# Altium PCB F4核心板.PcbDoc
Units mm, origin at the board's own origin, x right, y up, seen from the top; angles counter-clockwise.
Board outline 23 x 25 mm, 2 copper layers (Top Layer, Bottom Layer), stack 0.98 mm thick; 26 components, 60 nets, 180 pads, 115 vias.
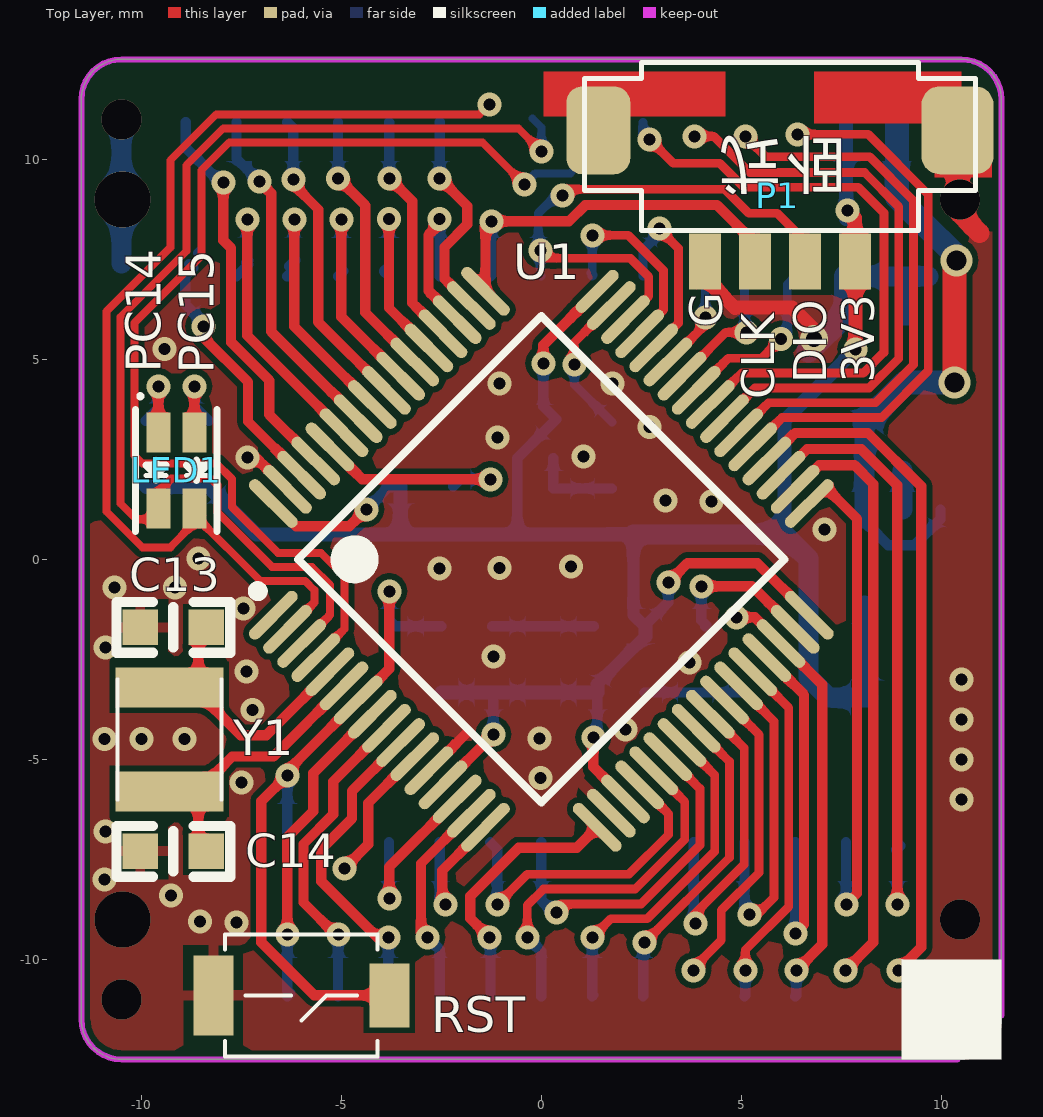
[diagram p0: Top Layer view]
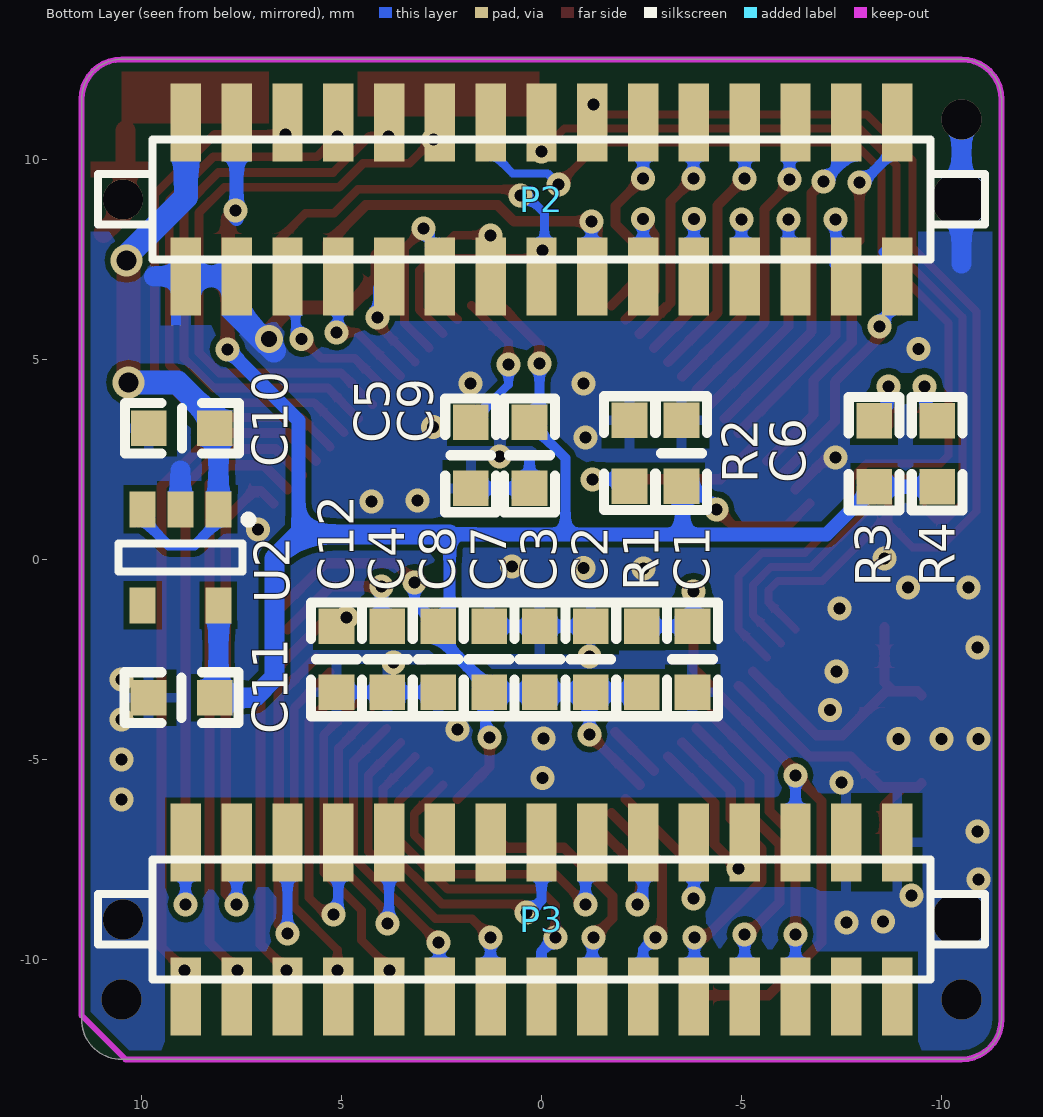
[diagram p1: Bottom Layer view, seen from below]
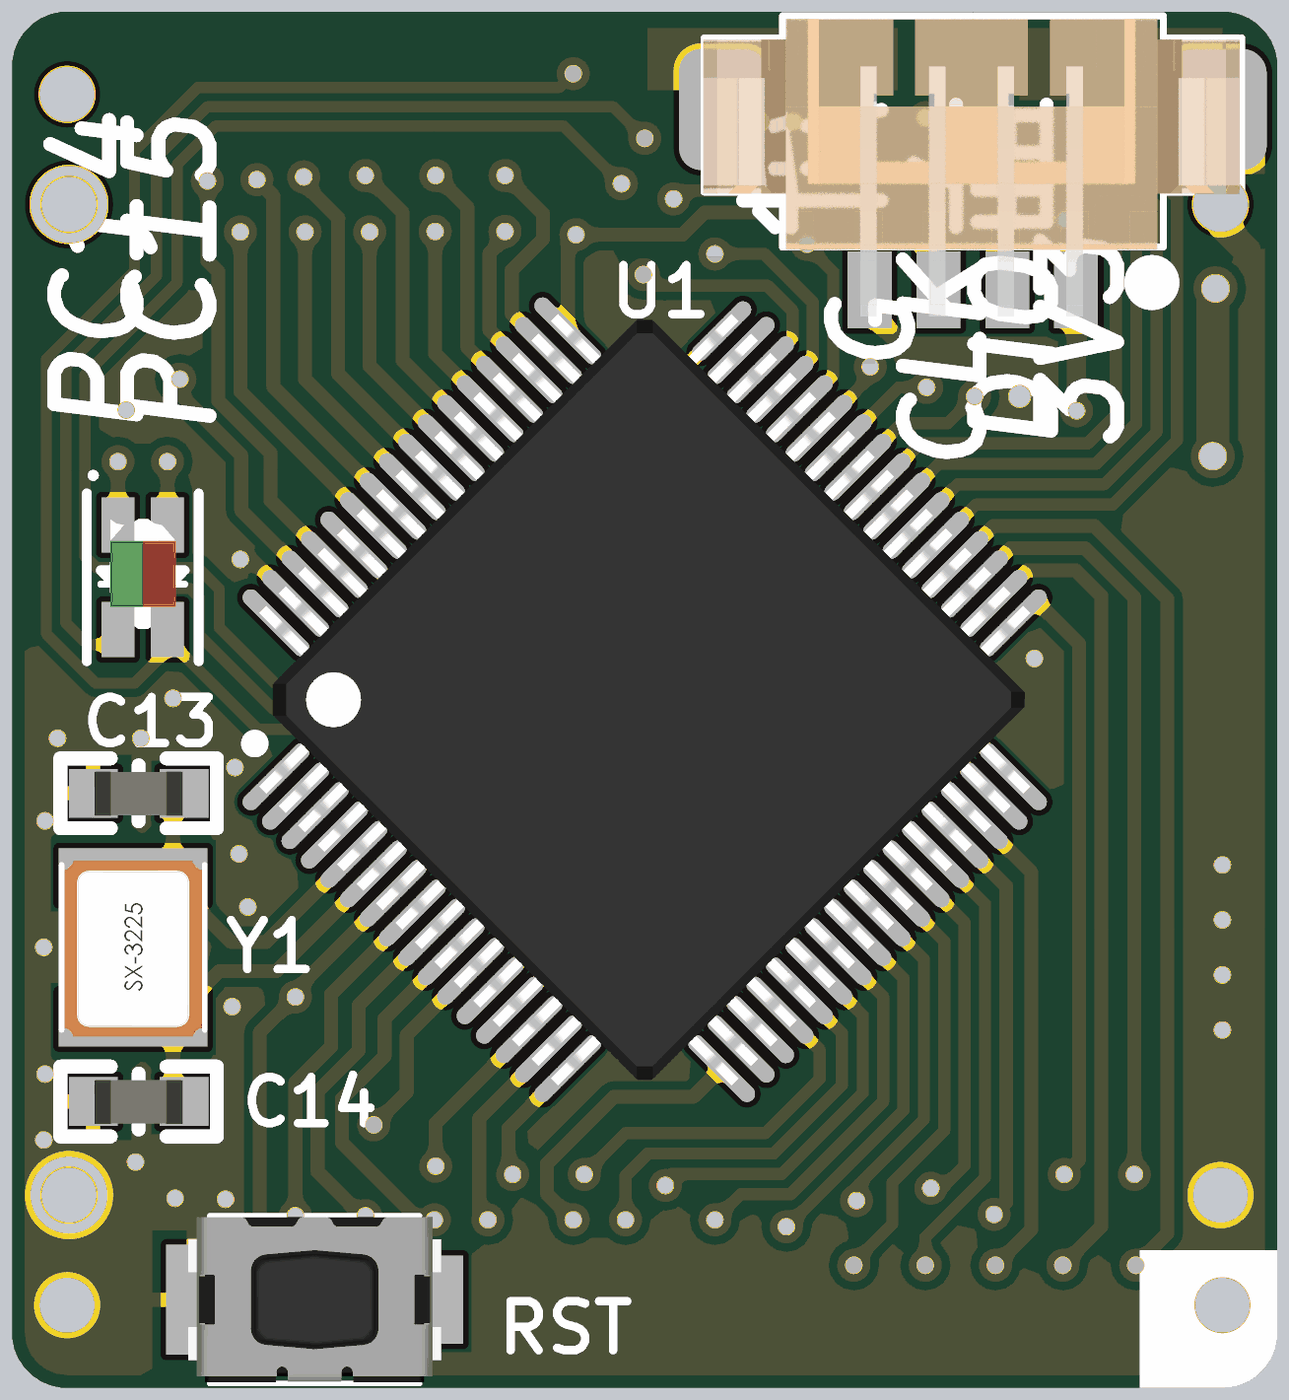
[diagram p2: 3D render of the assembled board from above, using the file's embedded part models]
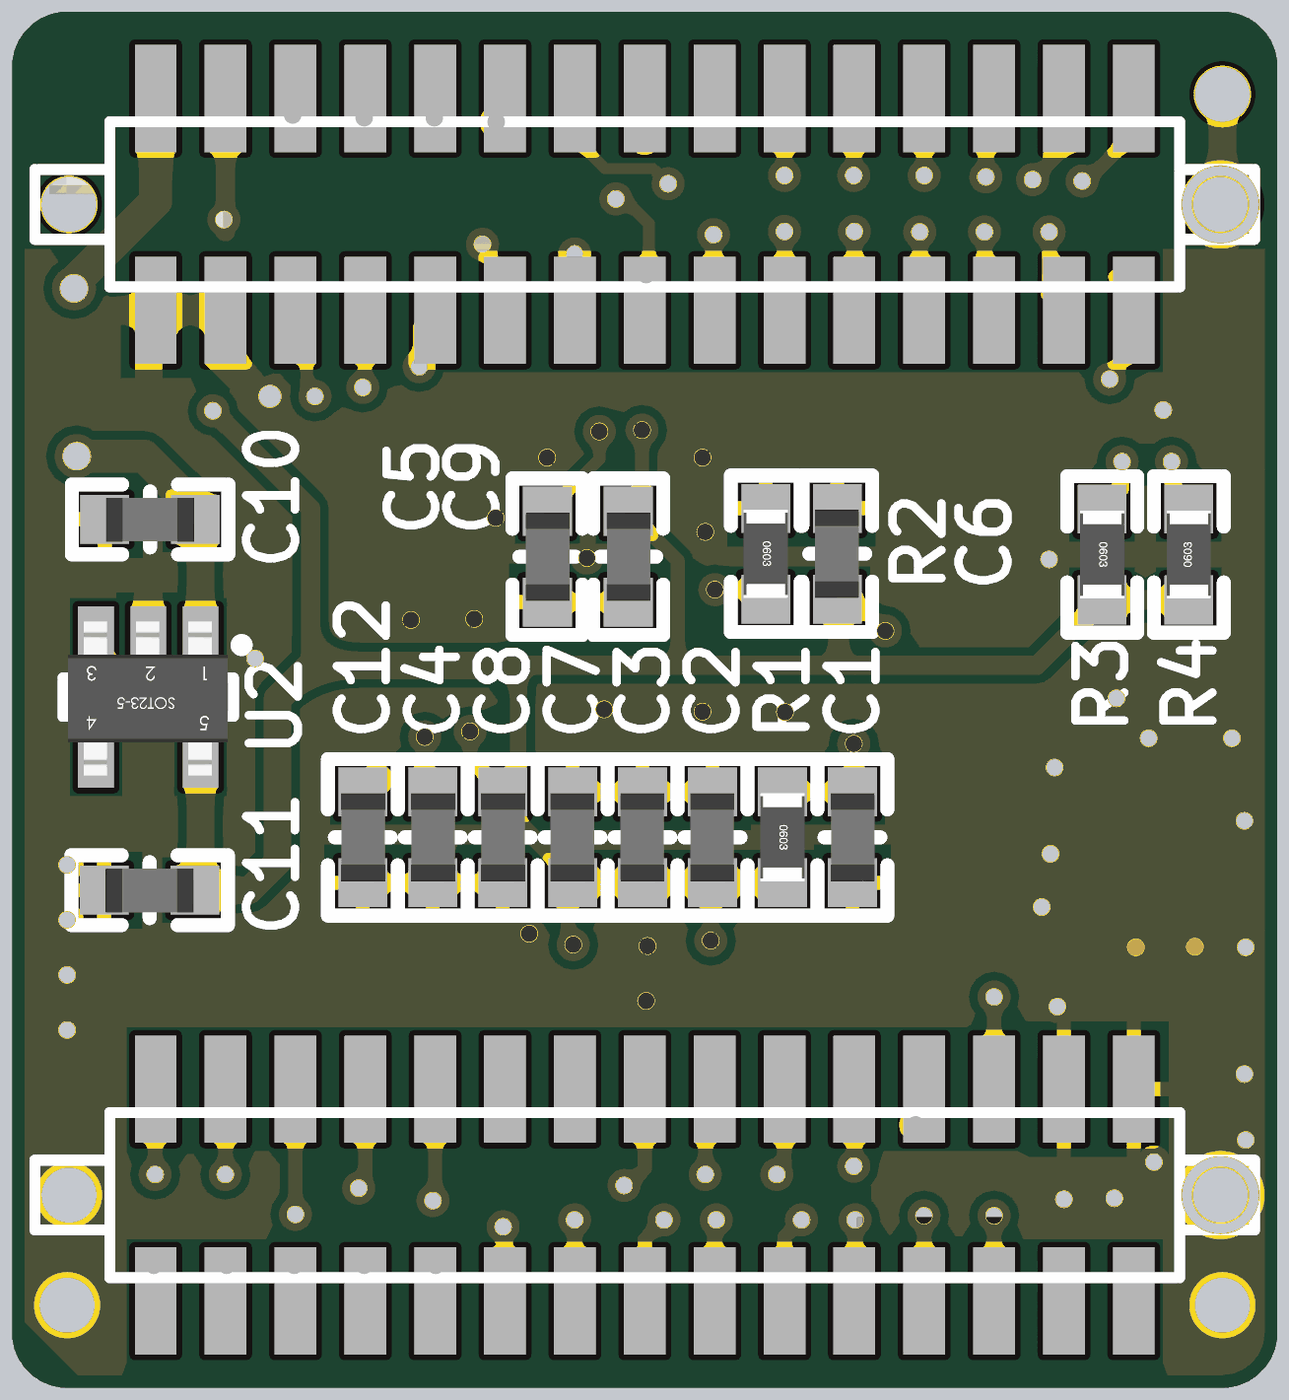
[diagram p3: 3D render of the assembled board from below, using the file's embedded part models]

## Layer stack, top to bottom
Top Solder: solder mask 0.0102, Solder Resist, Dk 3.5
Top Layer: signal copper 0.0356
Dielectric 1: dielectric 0.9086, FR-4, Dk 4.8
Bottom Layer: signal copper 0.0356
Bottom Solder: solder mask 0.0102, Solder Resist, Dk 3.5

## Board outline
-11.5,-11.5 -11.5,11.5 cw(c-10.5,11.5) -10.5,12.5 10.5,12.5 cw(c10.5,11.5) 11.5,11.5 11.5,-11.5 cw(c10.5,-11.5) 10.5,-12.5 -10.5,-12.5 cw(c-10.5,-11.5)

## Design rules (kind name [scope] priority, off if disabled: settings)
Clearance [All] p1: gap=0.15 ignorepadtopadclearanceinfootprint=FALSE except(0: Arc-Hole Track-Hole SMDPad-Hole THPad-Hole Via-Hole Fill-Hole Poly-Hole Region-Hole Text-Hole)
PolygonConnect PolygonConnect_1 [IsVia] p1: connectstyle=Direct reliefconductorwidth=0.254 reliefentries=4 polygonreliefangle="90 Angle" airgapwidth=0.254
PolygonConnect [All] p2: connectstyle=Relief reliefconductorwidth=0.254 reliefentries=4 polygonreliefangle="90 Angle" airgapwidth=0.254
RoomDefinition F4中心板 [InComponentClass('F4中心板')] p1: confinementstyle=ConfineIn formatcopy=TRUE lockcomponents=FALSE outline -13.5,-18.5 114.5,-18.5 114.5,36.5 -13.5,36.5
RoutingVias [All] p1: holewidth=0.3 width=0.6 viastyle="Through Hole" minholewidth=0.3 minwidth=0.6 maxholewidth=3 maxwidth=5
SolderMaskExpansion [All] p1: expansion=0.102 istentingtop=FALSE
Width [All] p1: maxlimit=3 minlimit=0.15 preferedwidth=0.254 minimp=50.000000 maximp=50.000000 favimp=50.000000
30 further rules are at their usual default settings.

## Components (designator, comment, footprint, x,y, rotation, side; value= is the part's Value field where it differs from the comment)
C1 "100nF" 0603C -3.775,-2.5 r90 bottom
C2 "100nF" 0603C -1.232,-2.5 r270 bottom
C3 "1uF" 0603C 0.039,-2.5 r270 bottom
C4 "2.2uF" 0603C 3.854,-2.5 r90 bottom
C5 "2.2uF" 0603C 1.77,2.6 r90 bottom
C6 "100nF" 0603C -3.5,2.653 r270 bottom
C7 "100nF" 0603C 1.311,-2.5 r270 bottom
C8 "100nF" 0603C 2.582,-2.5 r90 bottom
C9 "100nF" 0603C 0.3,2.6 r90 bottom
C10 "100nF" 0603C 8.992,3.277 r180 bottom
C11 "100nF" 0603C 9,-3.46 r180 bottom
C12 "2.2uF" 0603C 5.125,-2.5 r90 bottom
C13 "18pF" 0603C -9.2,-1.7 r0 top
C14 "18pF" 0603C -9.2,-7.3 r0 top
LED1 "Double_Color LED" 0805LEDX2 -9.125,2.225 r270 top
P1 "SWD/MX1.25" A1.25AW-4P 5.965,7.55 r180 top
P2 "HEADER" "HEADER 15x2 SMT 1.27MM" 0,9 r180 bottom
P3 "HEADER" "HEADER 15x2 SMT 1.27MM" 0,-9 r180 bottom
R1 "10k" 0603R -2.504,-2.5 r270 bottom
R2 "10k" 0603R -2.2,2.653 r270 bottom
R3 "1k" 0603R -8.315,2.639 r270 bottom
R4 "1k" 0603R -9.89,2.639 r90 bottom
RST "KEY" "SW 3mmx4mm" -6,-10.9 r180 top
U1 "STM32F405RGT6" LQFP_64 0,0 r45 top
U2 "LDO_SOT23-5" "SOT-23-5 L" 9.026,0.047 r270 bottom
Y1 "8MHz" NX3225GD -9.3,-4.5 r90 top

## Footprints (in the part's own frame and the unit in brackets; to place one, negate y for a bottom-side part, rotate by r counter-clockwise, add the part's x,y. Pads: shape width x height; smd on the part's side, far side on the other; paste and mask are expansions set on the pad)
0603C [mil] "Chip Resistor, 2-Leads, Body 1.6x0.8mm, IPC Medium Density"
  rect 35x35 smd: 1(-32.5,0) 2(32.5,0)
  silkscreen extent -56,-25 56,25, body extent -31,-16 31,15, height 18
0603R [mil] "10mil丝印"
  rect 35x35 smd: 1(-32.5,0) 2(32.5,0)
  silkscreen extent -56,-25 56,25, body extent -31,-16 31,16, height 16
0805LEDX2 [mm] "double_color"
  rect 1x0.6 smd: 1(-0.95,-0.45) 2(0.95,-0.45) 3(0.95,0.45) 4(-0.95,0.45)
  silkscreen extent -1.9,-1.02 1.52,1.02, body extent -1.06,-0.59 0.94,0.61, height 1
A1.25AW-4P [mm]
  rrect50% 1.8x2.2 smd: 0(-4.44,-3.175)
  round 1 on Top Overlay: 0(-3.253,-0.03)
  rrect50% 1.6x2.2 smd: 0(4.54,-3.175)
  rect 0.8x1.4 smd: 1(-1.875,0.1) 2(-0.625,0.1) 3(0.625,0.1) 4(1.875,0.1)
  silkscreen extent -4.88,-4.88 4.88,-0.68, body extent -4.85,-4.82 4.9,0.59, height 3.4
"HEADER 15x2 SMT 1.27MM" [mm] "2.54mm排针"
  rect 0.76x1.95 smd: 1(-8.89,1.925) 2(-8.89,-1.925) 3(-7.62,1.925) 4(-7.62,-1.925) 5(-6.35,1.925) 6(-6.35,-1.925) 7(-5.08,1.925) 8(-5.08,-1.925) 9(-3.81,1.925) 10(-3.81,-1.925) 11(-2.54,1.925) 12(-2.54,-1.925) 13(-1.27,1.925) 14(-1.27,-1.925) 15(0,1.925) 16(0,-1.925) 17(1.27,1.925) 18(1.27,-1.925) 19(2.54,1.925) 20(2.54,-1.925) 21(3.81,1.925) 22(3.81,-1.925) 23(5.08,1.925) 24(5.08,-1.925) 25(6.35,1.925) 26(6.35,-1.925) 27(7.62,1.925) 28(7.62,-1.925) 29(8.89,1.925) 30(8.89,-1.925)
  silkscreen extent -11.08,-1.5 11.08,1.5, body extent -11.22,-2.37 11.23,2.42, height 4.65
LQFP_64 [mm]
  oval 1.6x0.3 smd: 1(-5.725,3.75) 2(-5.725,3.25) 3(-5.725,2.75) 4(-5.725,2.25) 5(-5.725,1.75) 6(-5.725,1.25) 7(-5.725,0.75) 8(-5.725,0.25) 9(-5.725,-0.25) 10(-5.725,-0.75) 11(-5.725,-1.25) 12(-5.725,-1.75) 13(-5.725,-2.25) 14(-5.725,-2.75) 15(-5.725,-3.25) 16(-5.725,-3.75) 33(5.725,-3.75) 34(5.725,-3.25) 35(5.725,-2.75) 36(5.725,-2.25) 37(5.725,-1.75) 38(5.725,-1.25) 39(5.725,-0.75) 40(5.725,-0.25) 41(5.725,0.25) 42(5.725,0.75) 43(5.725,1.25) 44(5.725,1.75) 45(5.725,2.25) 46(5.725,2.75) 47(5.725,3.25)
  oval 0.3x1.6 smd: 17(-3.75,-5.725) 18(-3.25,-5.725) 19(-2.75,-5.725) 20(-2.25,-5.725) 21(-1.75,-5.725) 22(-1.25,-5.725) 23(-0.75,-5.725) 24(-0.25,-5.725) 25(0.25,-5.725) 26(0.75,-5.725) 27(1.25,-5.725) 28(1.75,-5.725) 29(2.25,-5.725) 30(2.75,-5.725) 31(3.25,-5.725) 32(3.75,-5.725) 49(3.75,5.725) 50(3.25,5.725) 51(2.75,5.725) 52(2.25,5.725) 53(1.75,5.725) 54(1.25,5.725) 55(0.75,5.725) 56(0.25,5.725) 57(-0.25,5.725) 58(-0.75,5.725) 59(-1.25,5.725) 60(-1.75,5.725) 61(-2.25,5.725) 62(-2.75,5.725) 63(-3.25,5.725) 64(-3.75,5.725)
  oval 1.4x0.3 smd: 48(5.725,3.75)
  silkscreen extent -5.7,-4.3 4.3,4.57, body extent -6.07,-6.07 6.07,6.07, height 1.62
NX3225GD [mm]
  rect 1x2.7 smd: 1(-1.3,0) 2(1.3,0)
  silkscreen extent -1.5,-1.3 1.5,1.3, body extent -1.63,-1.25 1.57,1.25, height 0.81
"SOT-23-5 L" [mm]
  rect 0.9x0.65 smd: 1(-1.2,0.95) 2(-1.2,0) 3(-1.2,-0.95) 4(1.2,-0.95) 5(1.2,0.95)
  silkscreen extent -1.05,-1.55 0.35,1.8, body extent -1.37,-1.46 1.43,1.44, height 1.09
"SW 3mmx4mm" [mm] "小龟按键"
  rect 1x1.6 smd: 1(-2.2,0)
  rect 1x2 smd: 2(2.2,0)
  silkscreen extent -1.91,-1.52 1.91,1.52, body extent -2.3,-1.5 2.3,1.5, height 2.1

## Part data
C1 C2 C3 C4 C5 C6 C7 C8 C9 C10 C11 C12 C13 C14: library part Cap, "Capacitor"
P1: library part SWD_HEADER
P2 P3: library part "HEADER 15x2", "15X2 header"
R1 R2 R3 R4: library part Res1, "Resistor"
RST: library part PushButton_2p, "Button"
U1: library part STM32F405RGT6_detail_1, "ARM Cortex-M4 32b MCU+FPU, 210DMIP, 1024 kB Flash, 192+4 kB RAM, 51 I/Os, 64-pin LQFP, -40 to +85癈, Tray"
Y1: library part XTAL, "Crystal Oscillator"

## Via types
v1: diameter 0.6, hole 0.3, Top Layer to Bottom Layer, tented both sides, 103 vias
v2: diameter 1, hole 1, Top Layer to Bottom Layer, 5 vias
v3: diameter 1.4, hole 1.4, Top Layer to Bottom Layer, 2 vias
v4: diameter 1, hole 1, Top Layer to Bottom Layer, tented both sides, 2 vias
v5: diameter 0.8, hole 0.5, Top Layer to Bottom Layer, tented both sides, 2 vias
v6: diameter 0.7, hole 0.4, Top Layer to Bottom Layer, tented both sides, 1 vias

## Nets (pads, with @x,y where several pads share a name; then routed paths per layer and width w, separated by ;. In a path a pad name is that pad's centre, name@x,y a point inside that pad or via, vN(x,y) a via of type N, cw(c..) or ccw(c..) an arc to the next point about the centre after c; other vN are vias at no path point)
3V3: C2.2 C3.2 C6.2 C7.2 C8.2 C9.2 C11.2 P1.1 P2.3 R1.2 R3.2 R4.1 U1.13 U1.19 U1.32 U1.48 U1.64 U2.5 | length 67.7
  Top Layer w0.254: U1.64 -6.128,0.825 -4.8,0.825 v1@-4.451,1.174 ; U1.13 -1.2,-4.382 v1(-1.2,-4.375) ; v1(0.05,4.9) 0.05,5.353 U1.48 ; v1(1.3,-4.45) 1.3,-5.189 U1.19 ; v1(3.175,-0.575) 3.652,-0.098 5.401,-0.098 U1.32
  Top Layer w0.35: v1(7.65,8.725) 7.84,8.535 P1.1@7.84,7.35 ; v1(7.85,5.25) P1.1@7.85,7.097
  Bottom Layer w0.254: v1(-4.375,1.25) -3.822,1.803 C6.2@-3.525,1.803 ; v1(-1.2,-4.375) C2.2@-1.2,-3.326 ; -0.6,0.625 -0.6,2.525 C9.2 0.375,3.5 0.05,3.825 v1(0.05,4.9) ; v1(1.3,-4.45) 1.4,-4.35 C7.2@1.4,-3.326 ; C8.2@2.6,-1.7 2.6,-1.647 3.175,-1.072 v1(3.175,-0.575)
  Bottom Layer w0.3: C7.2@1.4,-3.125 C8.2@2.6,-1.925 ; 2.3,0.625 2.3,-1.392 C8.2
  Bottom Layer w0.35: R4.1@-9.89,1.828 -9.876,1.814 R3.2 -7.126,0.625 -3.525,0.625 ; C6.2@-3.525,1.803 -3.525,0.625 ; R1.2@-2.5,-3.326 -1.2,-3.326 C7.2 1.4,-3.326 C7.2@1.4,-3.125 ; 2.3,0.625 -0.6,0.625 -3.525,0.625 ; C8.2@2.6,-1.925 C8.2@2.6,-1.7 ; 6.075,0.625 6.075,3.475 v1(7.85,5.25) ; P2.3 7.62,8.505 7.65,8.535 v1(7.65,8.725)
  Bottom Layer w0.5: 2.3,0.625 6.075,0.625 6.675,0.025 6.675,-2.95 7.185,-3.46 C11.2 8.076,-3.361 U2.5
5V: C10.2 P2.1 U2.1 U2.3 | length 15
  Top Layer w0.6: v5(10.325,4.425) 10.325,7.45 10.35,7.475 v5(10.375,7.475)
  Bottom Layer w0.254: U2.1 8.076,0.949 8.675,0.35 9.325,0.35 9.975,1 U2.3
  Bottom Layer w0.5: U2.1 C10.2@8.076,3.401
  Bottom Layer w0.6: C10.2@8.076,3.401 9.099,4.425 v5(10.325,4.425) ; P2.1 8.89,9.06 9.45,8.5 9.456,8.5 10.425,7.531 10.369,7.475 v5(10.375,7.475)
GND: C1.1 C2.1 C3.1 C4.1 C5.1 C6.1 C7.1 C8.1 C9.1 C10.1 C11.1 C12.1 C13.1 C14.1 P1.0@10.405,10.725 P1.4 P2.2 P2.4 P3.27 P3.29 R2.1 RST.2 U1.12 U1.18 U1.63 U2.2 | length 26.4
  Top Layer w0.254: v1(-7.35,2.55) -7.346,2.55 -7.246,2.65 U1.63 ; U1.12 -1.845,-4.32
  Top Layer w0.35: P1.4@4.097,7.6 4.097,7.028 4.846,6.279 4.866,6.3 6.264,6.3 6.813,5.751 v6(6.813,5.512)
  Top Layer w0.5: P1.0@10.405,10.725 10.405,9.06 v2(10.465,9) 10.465,8.643 10.95,8.158
  Bottom Layer w0.254: C2.1 C3.1 C7.1 ; 0.3,2.532 C9.1 C5.1 ; C8.1 C4.1 C12.1
  Bottom Layer w0.35: v6(6.813,5.512) 6.981,5.512 7.067,5.512 7.275,5.72
  Bottom Layer w0.5: -10.5,7.4 v2(-10.5,11) ; P2.4 P2.2 9.682,7.075 ; U2.2 9.026,2.225
  Bottom Layer w0.6: v6@6.685,5.216 6.981,5.512 7.62,6.151 P2.4
  other v1: -8.535,-9.057 -7.62,-9.075 -9.256,-8.4 -10.924,-7.999 -10.9,-6.8 10.5,-6 -7.5,-5.575 -0.025,-5.472 10.5,-5 -10.924,-4.498 -10,-4.487 -8.927,-4.498 -0.05,-4.475 2.1,-4.25 10.5,-4 -7.215,-3.765 10.5,-3 -7.376,-2.8 3.7,-2.575 -1.2,-2.425 -10.9,-2.2 -7.45,-1.23 -10.674,-0.7 -9.16,-0.7 -2.55,-0.225 -1.05,-0.216 0.738,-0.175 -8.574,0.025 7.083,0.75 4.25,1.45 3.1,1.469 1.05,2.575 -1.1,3.05 2.709,3.305 -1.05,4.4 1.775,4.4 -9.425,5.263
  other v2: -10.5,-11 10.5,-11 10.465,-9
  other v3: -10.465,-9 -10.465,9
  other v4: -10.465,-9 -10.465,9
NetC4_2: C4.2 U1.31 | length 3.9
  Top Layer w0.254: v1(4,-0.675) 5.271,-0.675 U1.31
  Bottom Layer w0.254: v1(4,-0.675) 4,-1.524 4.125,-1.649 C4.2@4.1,-1.675
NetC5_2: C5.2 U1.47 | length 3.7
  Top Layer w0.22: v1(0.825,4.875) 0.825,5.421 U1.47
  Bottom Layer w0.22: v1(0.825,4.875) 0.825,4.371 C5.2
NetC13_2: C13.2 U1.5 Y1.2 | length 7.1
  Top Layer w0.254: Y1.2@-9.5,-3.4 -9.4,-3.3 Y1.2@-8.8,-3.3 ; C13.2@-8.574,-1.7 -8.574,-3.075 Y1.2@-8.8,-3.3 ; U1.5 -6.875,-4.4 -7.518,-4.4 -8.618,-3.3 Y1.2@-8.8,-3.3
NetC14_2: C14.2 U1.6 Y1.1 | length 7.4
  Top Layer w0.254: Y1.1@-9.5,-5.6 -9.4,-5.7 Y1.1@-9.027,-5.7 ; C14.2@-8.574,-7.3 -8.574,-6.152 Y1.1@-9.027,-5.7 ; U1.6 -6.7,-4.932 -7.732,-4.932 -8.5,-5.7 Y1.1@-9.027,-5.7
NetLED1_1: LED1.1 R4.2 | length 2
  Top Layer w0.254: LED1.1@-9.575,3.35 v1(-9.575,4.325)
  Bottom Layer w0.254: R4.2 -9.575,3.78 v1(-9.575,4.325)
NetLED1_4: LED1.4 R3.1 | length 2
  Top Layer w0.254: LED1.4@-8.675,3.35 v1(-8.675,4.325)
  Bottom Layer w0.254: v1(-8.675,4.325) -8.675,3.825 R3.1
NetR2_2: R2.2 U1.60 | length 5.3
  Top Layer w0.254: U1.60 -4.475,2 v1(-1.275,2)
  Bottom Layer w0.254: R2.2 -2.028,2 v1(-1.275,2)
NRST: C1.2 P3.25 R1.1 RST.1 U1.7 | length 17.6
  Top Layer w0.254: RST.1 -5.675,-10.9 -7,-9.575 -7,-6.05 v1(-6.35,-5.4) -6.346,-5.4 -6.346,-5.286 U1.7 -3.8,-2.739 v1(-3.8,-0.8)
  Bottom Layer w0.254: P3.25 v1(-6.35,-5.4) ; v1(-3.8,-0.8) -3.8,-1.525 -3.65,-1.675 R1.1@-2.5,-1.675
PA0: P3.21 U1.14 | length 4.6
  Top Layer w0.254: v1(-3.8,-8.475) -3.8,-7.689 U1.14
  Bottom Layer w0.254: P3.21 -3.81,-8.465 v1(-3.8,-8.475)
PA1: P3.20 U1.15 | length 5.1
  Top Layer w0.254: v1@-3.01,-9.29 -3.01,-7.606 U1.15
  Bottom Layer w0.254: v1(-2.85,-9.45) -2.54,-9.76 P3.20
PA2: P3.19 U1.16 | length 4
  Top Layer w0.254: v1(-2.4,-8.625) -2.477,-8.548 -2.477,-7.78 U1.16
  Bottom Layer w0.254: P3.19 -2.54,-8.485 v1(-2.4,-8.625)
PA3: P3.18 U1.17 | length 6.6
  Top Layer w0.254: v1(-1.3,-9.45) -1.775,-8.975 -1.775,-8.425 -0.562,-7.213 0.884,-7.213 U1.17
  Bottom Layer w0.254: v1(-1.3,-9.45) -1.27,-9.48 P3.18
PA4: P3.17 U1.20 | length 8.2
  Top Layer w0.22: v1(-1.1,-8.625) -0.35,-7.875 2.19,-7.875 3.18,-6.885 3.18,-6.362 U1.20
  Bottom Layer w0.254: P3.17 -1.275,-7.08 -1.1,-7.255 v1(-1.1,-8.625)
PA5: P3.16 U1.21 | length 9.1
  Top Layer w0.22: v1(-0.35,-9.45) -0.35,-8.65 0.055,-8.245 2.343,-8.245 3.584,-7.004 3.584,-6.059 U1.21
  Bottom Layer w0.254: v1(-0.35,-9.45) 0,-9.8 P3.16
PA6: P3.15 U1.22 | length 8.8
  Top Layer w0.22: v1(0.375,-8.825) 0.375,-8.725 0.485,-8.615 2.497,-8.615 3.964,-7.148 3.964,-5.732 U1.22
  Bottom Layer w0.254: P3.15 0,-8.525 0.3,-8.825 v1(0.375,-8.825)
PA7: P3.14 U1.23 | length 8.5
  Top Layer w0.22: v1(1.275,-9.45) 1.74,-8.985 2.65,-8.985 4.334,-7.301 4.334,-5.395 U1.23
  Bottom Layer w0.254: P3.14 1.3,-10.895 1.275,-10.87 v1(1.275,-9.45)
PA8: P2.6 U1.41 | length 4.4
  Top Layer w0.22: U1.41 4.671,5.025 5.508,5.025 v1(5.994,5.512)
  Bottom Layer w0.22: v1(5.994,5.512) 6.147,5.664 6.147,6.872 P2.6
PA9: P2.8 U1.42 | length 3.5
  Top Layer w0.22: U1.42 4.614,5.675 v1(5.125,5.675)
  Bottom Layer w0.22: P2.8 5.08,5.72 v1(5.125,5.675)
PA10: P2.10 U1.43 | length 2.7
  Top Layer w0.22: U1.43 4.1,5.868 v1(4.1,6.05)
  Bottom Layer w0.22: P2.10 4.1,6.785 v1(4.1,6.05)
PA11: P2.12 U1.44 | length 5.7
  Top Layer w0.22: U1.44 3.426,5.901 3.426,7.774 v1@3.049,8.151 ; v1(2.95,8.275) 2.95,8.196 3.021,8.125 v1@3.048,8.151
  Bottom Layer w0.22: P2.12 P2.12@2.54,7.715 ; v1(2.95,8.275) 2.95,8.125 P2.12@2.54,7.715 ; v1@3,8.3 3.05,8.25 2.54,7.74 P2.12@2.54,7.715
PA12: P2.14 U1.45 | length 5
  Top Layer w0.22: v1(1.275,8.1) 2.175,8.1 3.056,7.219 3.056,6.238 U1.45
  Bottom Layer w0.22: P2.14 1.3,7.105 1.245,7.16 1.275,7.191 v1(1.275,8.1)
PA13/SWDIO: P1.2 P2.16 U1.46 | length 13.7
  Top Layer w0.22: v1(-0.025,7.725) 0.175,7.525 2.227,7.525 2.686,7.066 2.686,6.575 U1.46 ; v1(0.525,9.1) 0.675,9.25 4.587,9.25 5.187,8.65 5.9,8.65 6.597,7.953 P1.2@6.597,7.6
  Bottom Layer w0.22: P2.16 -0.007,7.082 0,7.09 -0.025,7.115 v1(-0.025,7.725) -0.075,7.775 -0.075,8.65 0.375,9.1 v1(0.525,9.1)
PA14/SWCLK: P1.3 P2.18 U1.49 | length 10.7
  Top Layer w0.254: U1.49 -1.397,8.303 v1(-1.25,8.45) 0.691,8.45 1.095,8.854 4.396,8.854 5.347,7.903 P1.3@5.347,7.6
  Bottom Layer w0.254: P2.18 -1.25,7.095 v1(-1.25,8.45)
PA15: P2.19 U1.50 | length 5.4
  Top Layer w0.254: v1(-2.54,9.525) -1.85,8.835 -1.85,8.375 -2.417,7.808 -2.417,7.013 U1.50
  Bottom Layer w0.254: v1(-2.54,9.525) P2.19
PB0: P3.10 U1.26 | length 7.8
  Top Layer w0.22: v1@3.8,-10.25 3.8,-10.225 4.5,-9.525 4.5,-8.775 5.444,-7.831 5.444,-4.383 U1.26
  other v1: 3.8,-10.275
PB1: P3.7 U1.27 | length 8.5
  Top Layer w0.22: U1.27 5.814,-4.046 5.814,-8.461 5.25,-9.025 5.2,-8.975 v1(5.2,-8.875)
  Bottom Layer w0.254: P3.7 5.08,-8.755 v1(5.2,-8.875)
PB2: P3.8 U1.28 | length 8.9
  Top Layer w0.22: v1@5.1,-10.225 5.1,-9.767 6.184,-8.683 6.184,-3.709 U1.28
  Bottom Layer w0.254: P3.8 5.1,-10.905 v1(5.1,-10.275) P3.8@5.1,-10.225
PB3: P2.24 U1.55 | length 6
  Top Layer w0.254: v1(-5,8.5) -5,6.061 U1.55
  Bottom Layer w0.254: P2.24 -4.95,7.205 -5,7.255 v1(-5,8.5)
PB4: P2.25 U1.56 | length 7.7
  Top Layer w0.254: v1(-6.2,9.5) -6.2,9.375 -5.57,8.746 -5.577,8.739 -5.577,5.931 U1.56
  Bottom Layer w0.254: P2.25 -6.2,10.775 v1(-6.2,9.5)
PB5: P2.26 U1.57 | length 7
  Top Layer w0.254: v1(-6.175,8.5) -6.175,5.821 U1.57
  Bottom Layer w0.254: P2.26 -6.2,7.225 -6.3,7.325 -6.15,7.475 -6.175,7.5 v1(-6.175,8.5)
PB6: P2.27 U1.58 | length 8.7
  Top Layer w0.254: v1(-7.05,9.45) -6.752,9.152 -6.752,5.691 U1.58
  Bottom Layer w0.254: P2.27 -7.62,10.02 v1(-7.05,9.45)
PB7: P2.28 U1.59 | length 7.9
  Top Layer w0.254: v1(-7.35,8.5) -7.35,5.596 -4.932,3.178 U1.59
  Bottom Layer w0.254: P2.28 -7.325,7.37 -7.375,7.42 -7.325,7.47 -7.35,7.495 v1(-7.35,8.5)
PB8: P2.29 U1.61 | length 9.9
  Top Layer w0.254: v1(-7.95,9.425) -7.95,7.975 -7.754,7.779 -7.754,5.428 -6.8,4.474 -6.8,3.618 U1.61
  Bottom Layer w0.254: P2.29 -8.89,10.286 -8.029,9.425 v1(-7.95,9.425)
PB9: P2.30 U1.62 | length 6.8
  Top Layer w0.254: v1(-8.45,5.825) -8.45,5.603 -8.475,5.578 -7.334,4.437 -7.334,3.445 U1.62
  Bottom Layer w0.254: P2.30@-8.8,7.385 -8.7,7.285 -8.9,7.085 -8.9,6.375 -8.375,5.85 -8.425,5.8 v1(-8.45,5.825) ; P2.30@-8.575,7.66 P2.30@-8.55,7.685
PB10: P3.5 U1.29 | length 9.7
  Top Layer w0.254: U1.29 6.571,-3.389 6.571,-9.129 v1(6.35,-9.35)
  Bottom Layer w0.254: v1(6.35,-9.35) 6.35,-7.125 6.375,-7.1 P3.5
PB11: C12.2 P3.6 U1.30 | length 10.9
  Top Layer w0.254: v1(4.875,-1.45) 5.339,-1.45 U1.30 7.025,-3.136 7.025,-9.625 v1(6.375,-10.275)
  Bottom Layer w0.254: P3.6 6.375,-10.9 v1(6.375,-10.275) P3.6@6.375,-10.25
PB12: P3.3 U1.33 | length 12.9
  Top Layer w0.254: U1.33 7.012,1.708 7.196,1.708 7.896,1.009 7.896,-8.092 7.894,-8.094 7.894,-8.356 v1(7.625,-8.625)
  Bottom Layer w0.254: P3.3 7.62,-8.62 v1(7.625,-8.625)
PB13: P3.4 U1.34 | length 14.8
  Top Layer w0.254: U1.34 6.946,2.35 7.832,2.35 8.3,1.882 8.3,-9.575 v1(7.6,-10.275)
PB14: P3.1 U1.35 | length 15.7
  Top Layer w0.254: U1.35 6.643,2.754 8,2.754 8.9,1.854 v1(8.9,-8.625)
  Bottom Layer w0.254: P3.1 8.975,-7.16 8.875,-7.26 8.9,-7.285 v1(8.9,-8.625)
PB15: P3.2 U1.36 | length 17.1
  Top Layer w0.254: U1.36 6.34,3.158 8.167,3.158 9.5,1.825 9.5,-9.7 v1(8.925,-10.275)
  Bottom Layer w0.254: P3.2@8.925,-10.325 v1(8.925,-10.275) P3.2@8.925,-10.225
PC0: P3.26 U1.8 | length 8
  Top Layer w0.254: v1(-6.35,-9.375) -6.35,-6.95 -5.7,-6.3 -5.7,-5.346 U1.8
  Bottom Layer w0.254: P3.26 -6.275,-10.85 -6.35,-10.775 v1(-6.35,-9.375)
PC1: P3.24 U1.9 | length 8
  Top Layer w0.254: v1(-5.075,-9.375) -5.15,-9.375 -5.946,-8.579 -5.946,-7.117 -5.2,-6.371 -5.2,-5.554 U1.9
  Bottom Layer w0.254: P3.24 -5.08,-9.38 v1(-5.075,-9.375)
PC2: P3.22 U1.10 | length 8
  Top Layer w0.254: v1(-3.825,-9.45) -4.1,-9.45 -5.502,-8.048 -5.502,-7.245 -4.729,-6.472 -4.729,-5.79 U1.10
  Bottom Layer w0.254: v1(-3.825,-9.45) -3.825,-10.91 P3.22
PC3: P3.23 U1.11 | length 3.5
  Top Layer w0.254: v1(-4.925,-7.725) -4.325,-7.125 -4.325,-6.093 U1.11
PC4: P3.12 U1.24 | length 8
  Top Layer w0.22: v1(2.575,-9.575) 2.583,-9.575 4.704,-7.454 4.704,-5.058 U1.24
  Bottom Layer w0.254: P3.12 2.55,-10.915 2.55,-9.525 2.575,-9.55 v1(2.575,-9.575)
PC5: P3.9 U1.25 | length 8.1
  Top Layer w0.22: v1(3.85,-9.1) 3.85,-8.85 5.074,-7.626 5.074,-4.72 U1.25
  Bottom Layer w0.254: P3.9 3.81,-9.06 v1(3.85,-9.1)
PC6: P2.5 U1.37 | length 13.5
  Top Layer w0.22: U1.37 6.02,3.545 8.507,3.545 9.675,4.713 9.675,9.12 8.17,10.625 v1(6.4,10.625)
PC7: P2.7 U1.38 | length 14
  Top Layer w0.22: U1.38 5.683,3.915 8.353,3.915 9.305,4.867 9.305,8.967 8.207,10.065 5.61,10.065 v1(5.1,10.575)
PC8: P2.9 U1.39 | length 14.7
  Top Layer w0.22: v1(3.825,10.575) 4.308,10.575 5.213,9.67 8.078,9.67 8.935,8.813 8.935,5.02 8.2,4.285 5.346,4.285 U1.39
  Bottom Layer w0.22: P2.9@3.725,10.575 v1(3.825,10.575)
PC9: P2.11 U1.40 | length 15.2
  Top Layer w0.22: v1(2.7,10.5) 3.3,9.9 4.46,9.9 5.06,9.3 7.925,9.3 8.565,8.66 8.565,5.173 8.047,4.655 5.009,4.655 U1.40
  Bottom Layer w0.22: P2.11@2.54,10.7 P2.11
PC10: P2.20 U1.51 | length 4.4
  Top Layer w0.254: v1(-2.54,8.509) -2.54,8.392 -2.821,8.111 -2.821,6.71 U1.51
  Bottom Layer w0.254: P2.20 v1(-2.54,8.509)
PC11: P2.21 U1.52 | length 5.8
  Top Layer w0.254: v1(-3.8,9.525) -3.225,8.95 -3.225,6.407 U1.52
  Bottom Layer w0.254: P2.21 -3.8,10.915 v1(-3.8,9.525)
PC12: P2.22 U1.53 | length 5.2
  Top Layer w0.254: v1(-3.81,8.509) -3.81,6.285 U1.53
  Bottom Layer w0.254: P2.22 -3.937,7.202 -3.81,7.329 v1(-3.81,8.509)
PC13/LED2: LED1.3 P2.17 U1.2 | length 26.4
  Top Layer w0.2: LED1.3@-8.675,1.45 LED1.3 -8.675,1.155 LED1.3@-8.675,1.11 ; U1.2 -5.675,-1.079 -5.675,-0.771 -5.909,-0.537 -7.028,-0.537 LED1.3@-8.675,1.11 ; v1(-1.3,11.375) -1.55,11.125 -8.125,11.125 -9.275,9.975 -9.275,7.797 -10.875,6.197 -10.875,1.2 -9.975,0.3 -9.275,0.3 -8.675,0.9 LED1.3@-8.675,1.11
PC14/LED1: LED1.2 P2.15 U1.3 | length 28.7
  Top Layer w0.2: LED1.2 -9.85,1 -10.125,1 -10.525,1.4 -10.525,6.052 -8.875,7.702 -8.875,9.85 -7.95,10.775 -0.575,10.775 v1(0,10.2) ; LED1.2@-9.575,1.45 -9.575,1.7 -9.25,2.025 -8.271,2.025 -8.1,1.854 -8.1,1.184 -6.729,-0.187 -5.738,-0.187 -5.286,-0.639 -5.286,-1.397 U1.3
  Bottom Layer w0.2: P2.15@-0.225,11.025 0,10.8 v1(0,10.2)
PC15: P2.13 U1.4 | length 28.6
  Top Layer w0.2: U1.4 -4.925,-1.743 -4.925,-0.425 -5.513,0.163 -6.584,0.163 -7.732,1.311 -7.732,2.007 -8.125,2.4 -9.975,2.4 -10.175,2.6 -10.175,5.907 -8.5,7.582 -8.5,9.725 -7.8,10.425 -1.475,10.425 v1(-0.425,9.375)
  Bottom Layer w0.2: v1(-0.425,9.375) -0.15,9.65 0.725,9.65 1.27,10.195 P2.13
PD2: P2.23 U1.54 | length 6.8
  Top Layer w0.254: v1(-5.08,9.525) -4.403,8.848 -4.403,6.171 U1.54
  Bottom Layer w0.254: v1(-5.08,9.525) P2.23
pads on no net: P1.0@1.425,10.725 P1.0@9.218,7.58 P3.11 P3.13 P3.28 P3.30 U1.1 U2.4

## Polygon pours and split planes (outlines as drawn)
GND on Bottom Layer "Bottom Layer-GND" (solid, remove dead copper, pour order 2): -12,-13 12,-13 12,8.193 -12,8.193
GND on Top Layer "Bottom Layer-GND" (solid, remove dead copper, pour order 4): -12,-13 12,-13 12,8.193 -12,8.193

## Keep-outs
Keep-Out Layer:
  lines w0.15: -11.5,-11.5 ccw(c-10.5,-11.5) -10.5,-12.5 10.4,-12.5 11.5,-11.4 11.5,11.5 ccw(c10.5,11.5) 10.5,12.5 -10.5,12.5 ccw(c-10.5,11.5) -11.5,11.5 -11.5,-11.5

## Other copper
Top Layer:
  rectangle net GND: 9.825,9.55 11.271,9.949
  rectangle net GND: 6.813,10.9 10.5,12.2
  rectangle: 0.05,11.075 4.6,12.2
Bottom Layer:
  rectangle net GND: 9.017,5.846 9.267,7.075
  region net GND: -10.465,9

## Silkscreen, mask and mechanical layers (free items; w line width, h text height)
Top Overlay:
  rectangle: 9,-12.5 11.5,-10
  region: 10.4,-12.5
  text "G" at 4.8,5.799 h1.4 r90
  text "PC14" at -9.224,4.67 h1.5 r90
  text "PC15" at -7.898,4.645 h1.5 r90
  text "3V3" at 8.6,4.409 h1.4 r90
  text "DIO" at 7.4,4.398 h1.4 r90
  text "CLK" at 6.1,4 h1.4 r90
Mechanical 1:
  the board outline again, w0.15

## Text inside footprints (layer, text, board x,y; h text height)
P1: Top Overlay "卧式" at 7.665,10.825 h2.03 r180